# Altium PCB PDN Sample.PcbDoc
Units mm, origin at the board's own origin, x right, y up, seen from the top; angles counter-clockwise.
Board outline 47.25 x 33.5 mm, 4 copper layers (Top Layer, Mid Layer 1, Mid Layer 2, Bottom Layer), stack 1.57 mm thick; 4 components, 3 nets, 8 pads, 0 vias.
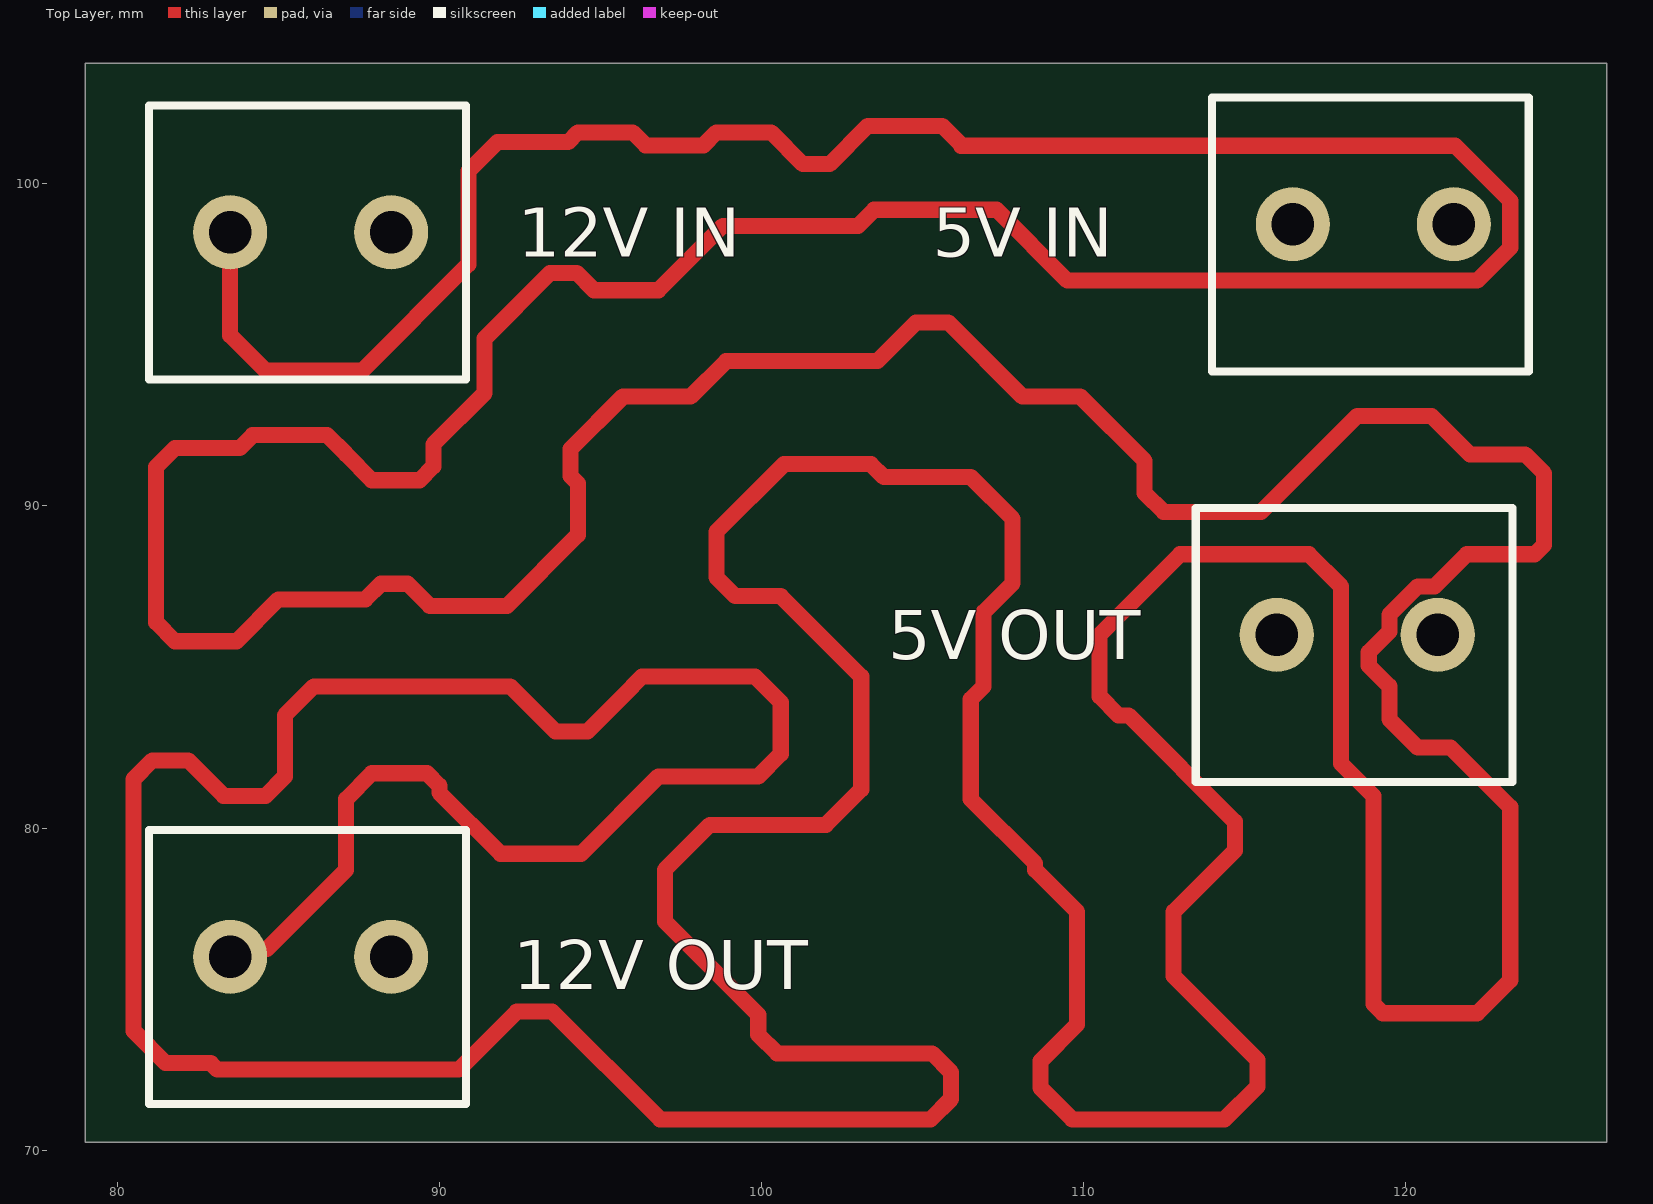
[diagram p0: Top Layer view]
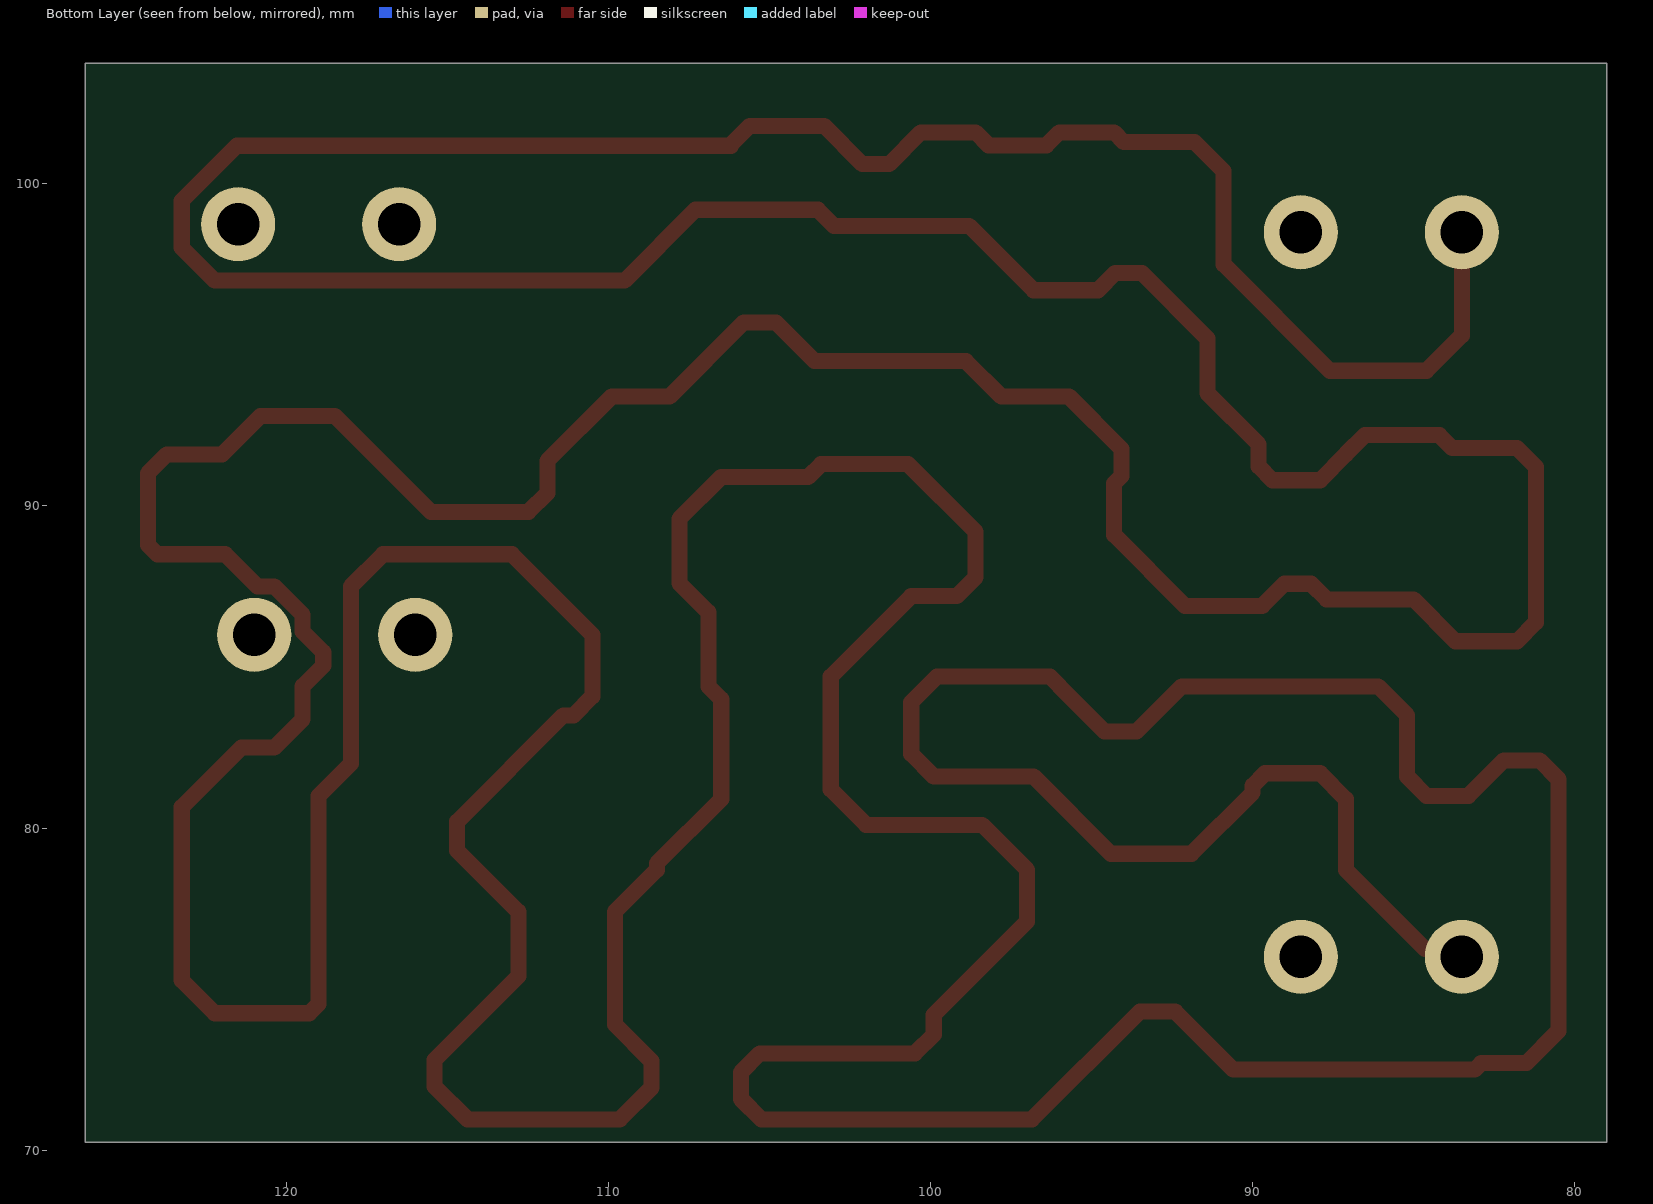
[diagram p1: Bottom Layer view, seen from below]
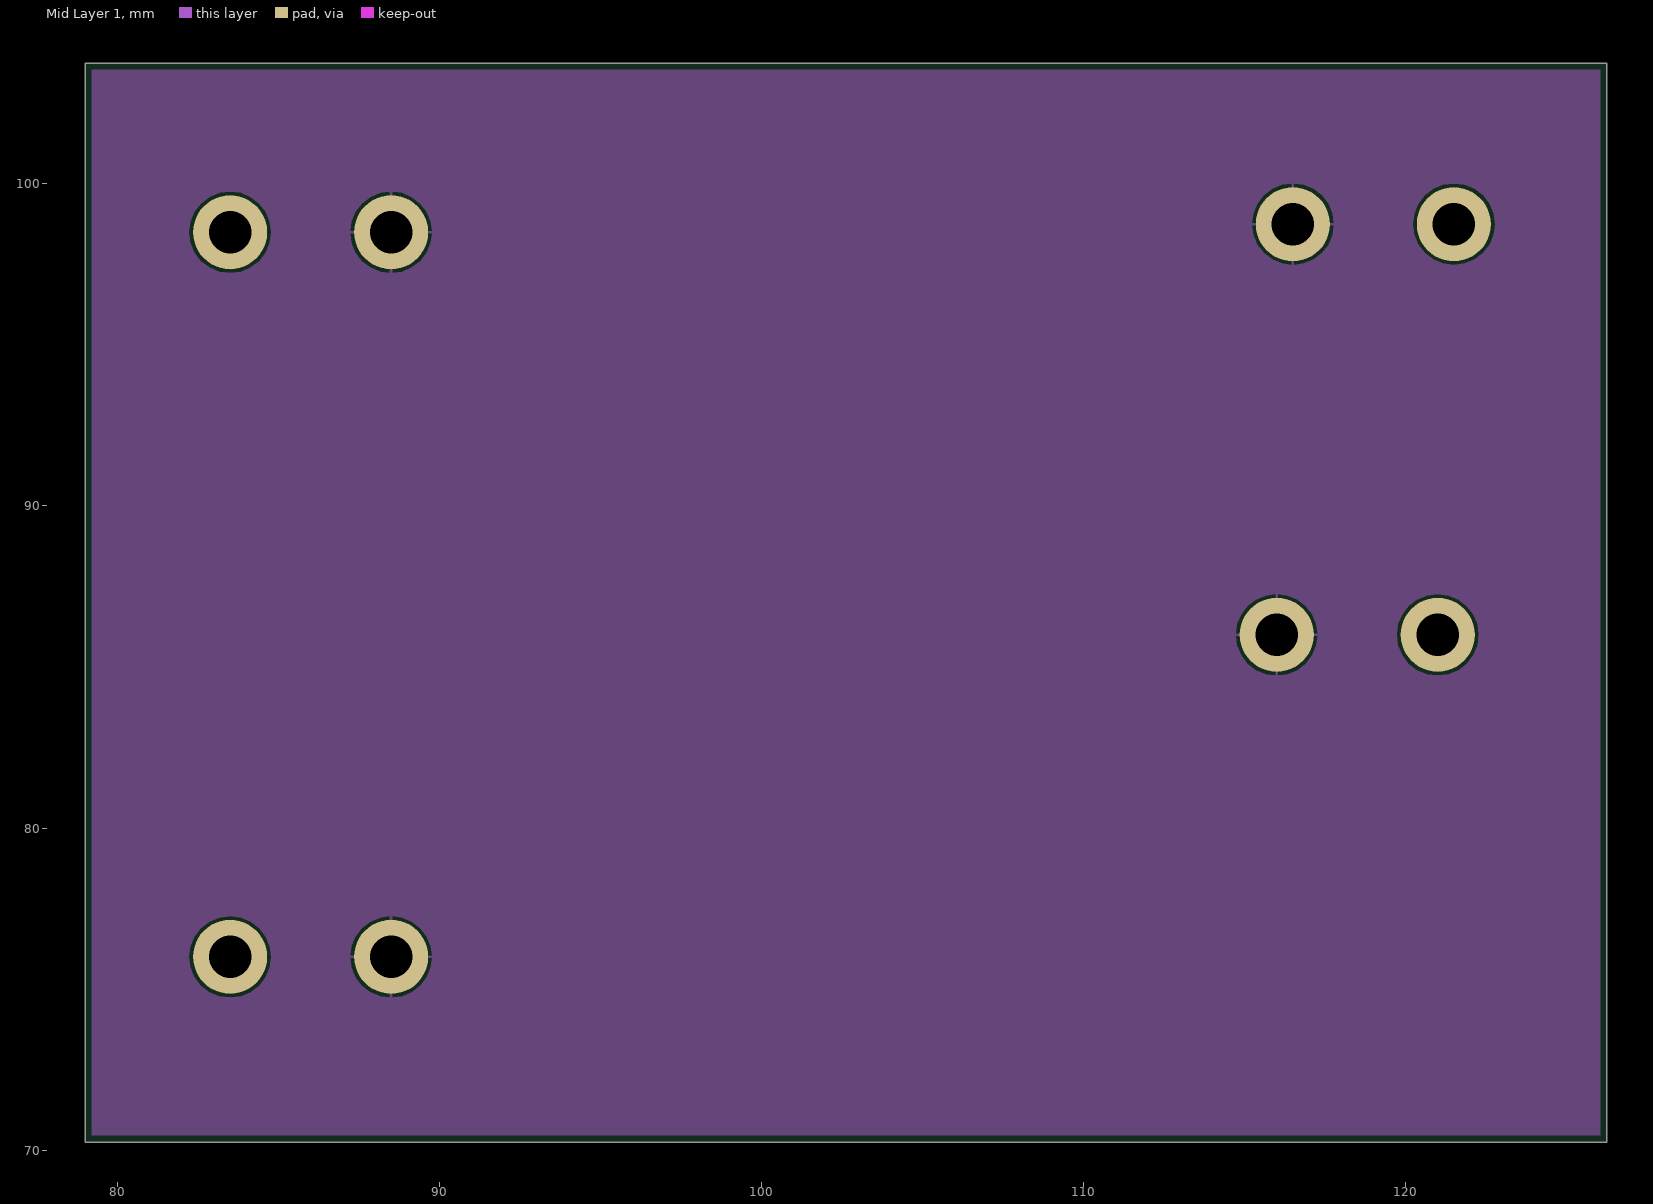
[diagram p2: Mid Layer 1]
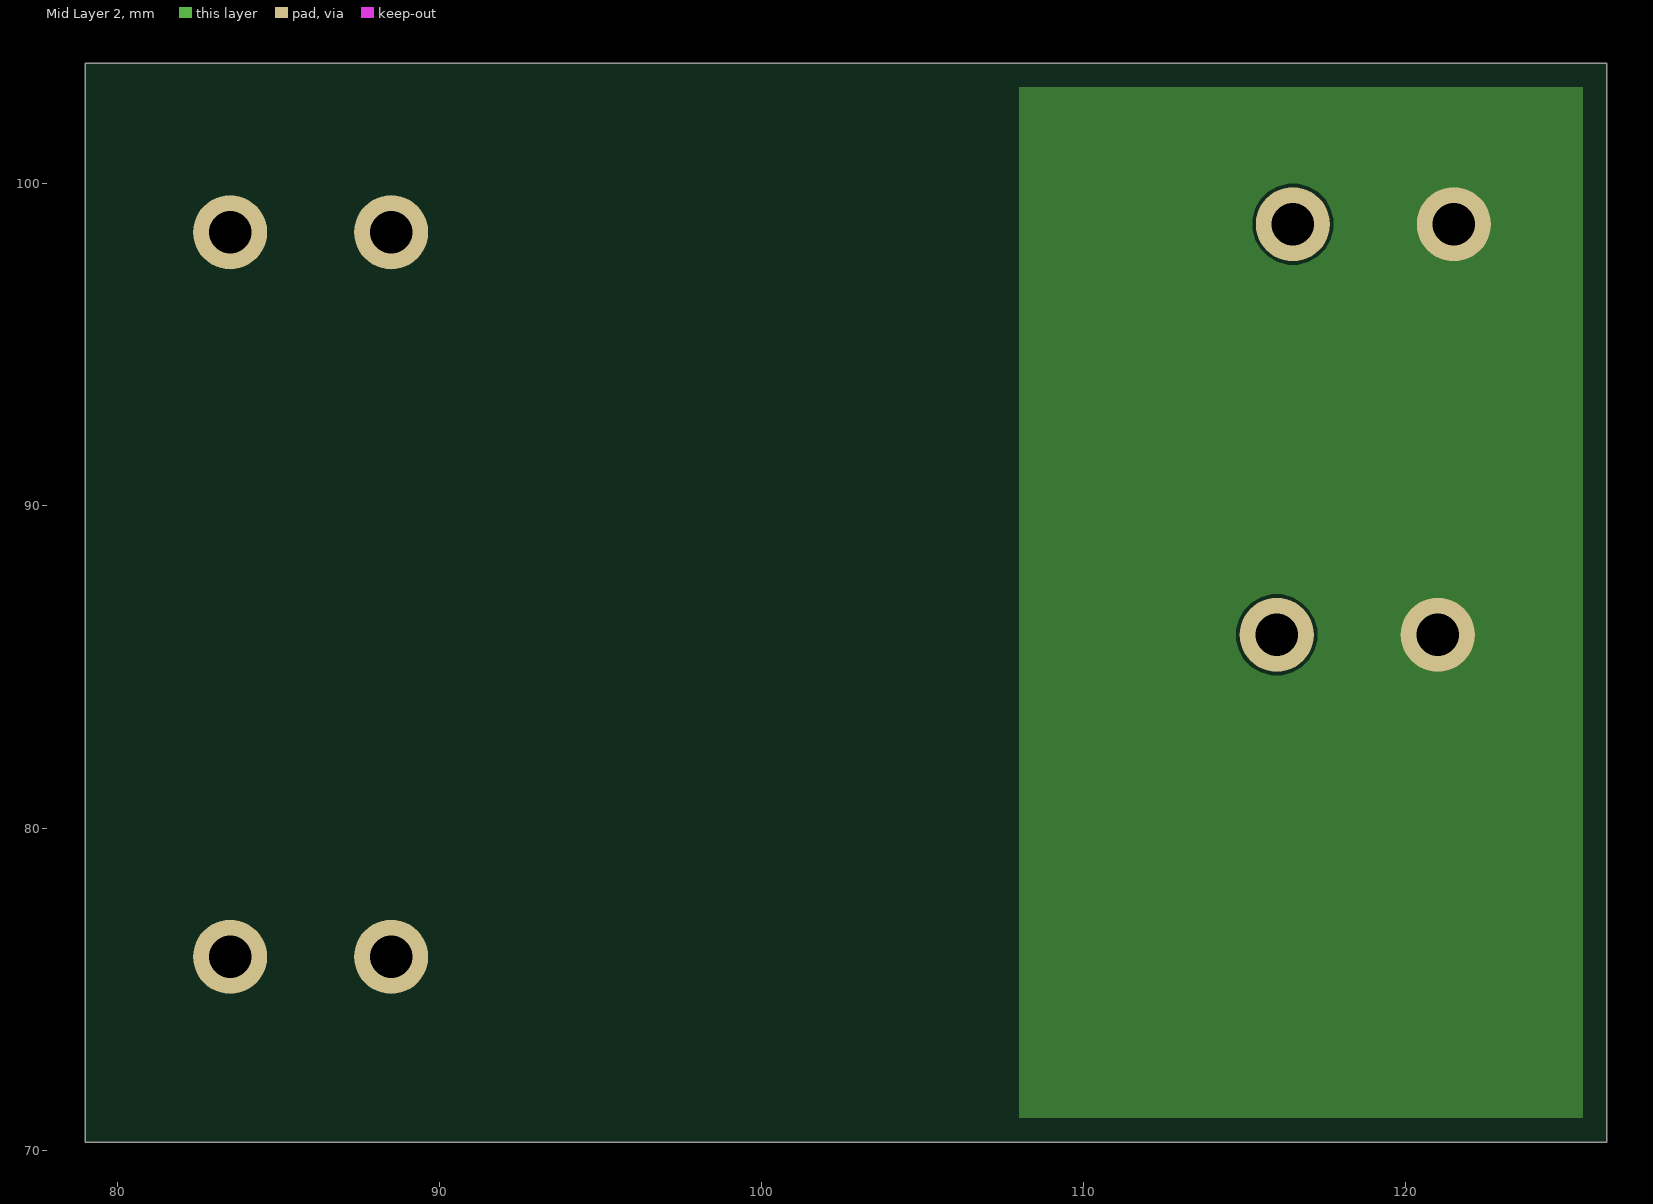
[diagram p3: Mid Layer 2]
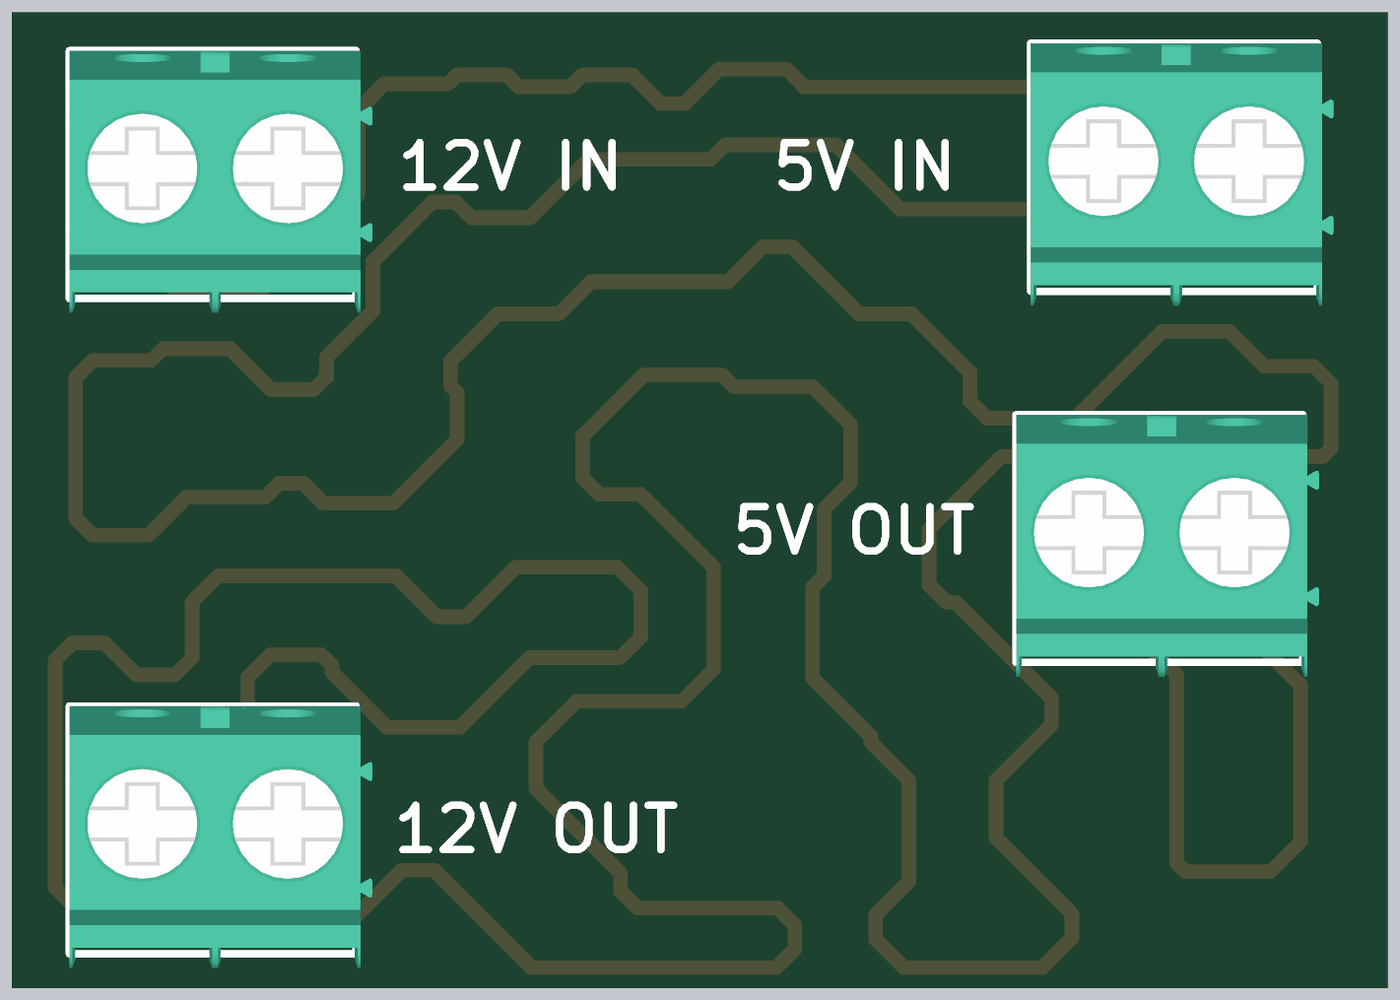
[diagram p4: 3D render of the assembled board from above, using the file's embedded part models]

## Layer stack, top to bottom
Top Solder: solder mask 0.0127, Solder Resist, Dk 3.8
Top Layer: signal copper 0.035
Dielectric 1: prepreg 0.2, 7628, Dk 4.6
Mid Layer 1: signal copper 0.0175
Core: core 1.065, FR-4, Dk 4.5
Mid Layer 2: signal copper 0.0175
Dielectric 2: prepreg 0.2, 7628, Dk 4.6
Bottom Layer: signal copper 0.035
Bottom Solder: solder mask 0.0127, Solder Resist, Dk 3.8

## Board outline
79,70.25 79,103.75 126.25,103.75 126.25,70.25

## Design rules (kind name [scope] priority, off if disabled: settings)
BoardOutlineClearance [All] p1: gap=0.2 ignorepadtopadclearanceinfootprint=FALSE
Clearance [All] p1: gap=0.102 ignorepadtopadclearanceinfootprint=FALSE except(0.127: Arc-Via Track-Via SMDPad-Via THPad-Via Via-Via Via-Fill Via-Poly Via-Region Via-Text; 0.25: Arc-Hole Track-Hole SMDPad-Hole THPad-Hole Via-Hole Fill-Hole Poly-Hole Region-Hole Text-Hole)
ComponentClearance [All] p1: gap=0.102 collisioncheckmode=3 verticalgap=0.102 showdistances=TRUE
DiffPairsRouting [All] p1: maxlimit=0.102 minlimit=0.102 mostfreqgap=0.102 toplayer_minwidth=0.102 toplayer_maxwidth=1816.048 toplayer_prefwidth=0.102 midlayer1_minwidth=0.102 midlayer1_maxwidth=1816.048 midlayer1_prefwidth=0.102 midlayer2_minwidth=0.102 midlayer2_maxwidth=1816.048 midlayer2_prefwidth=0.102 bottomlayer_minwidth=0.102 bottomlayer_maxwidth=1816.048 bottomlayer_prefwidth=0.102 maxuncoupledlength=12.7
Height [All] p1: minheight=0 maxheight=1816.048 prefheight=12.7
HoleSize [All] p1: absolutevalues=TRUE maxlimit=6.3 minlimit=0.2 maxpercent=80.000 minpercent=20.000
HoleToHoleClearance [All] p1: gap=0.25 allowstackedmicrovias=FALSE
MinimumAnnularRing [All] p1: minimumring=0.076
MinimumSolderMaskSliver [All] p1: minsoldermaskwidth=0
PlaneClearance [All] p1: clearance=0.102
PlaneConnect PlaneConnectPowerPads [InPadClass('PowerPads')] p1: planeconnectstyle=Direct reliefexpansion=0.508 reliefentries=4 reliefconductorwidth=0.254 reliefairgap=0.254
PlaneConnect [All] p2: pad.planeconnectstyle=Relief pad.reliefexpansion=0.3 pad.reliefentries=4 pad.reliefconductorwidth=0.102 pad.reliefairgap=0.102 via.planeconnectstyle=Direct via.reliefexpansion=0.3 via.reliefentries=4 via.reliefconductorwidth=0.127 via.reliefairgap=0.127
PolygonConnect PolygonConnectPowerPads [All vs (InPadClass('PowerPads'))] p1: connectstyle=Direct reliefconductorwidth=0.254 reliefentries=4 polygonreliefangle="90 Angle" airgapwidth=0.254
PolygonConnect [All] p2: thpad.connectstyle=Relief thpad.reliefconductorwidth=0.102 thpad.reliefentries=4 thpad.polygonreliefangle="90 Angle" thpad.airgapwidth=0.102 smdpad.connectstyle=Relief smdpad.reliefconductorwidth=0.102 smdpad.reliefentries=4 smdpad.polygonreliefangle="90 Angle" smdpad.airgapwidth=0.102 via.connectstyle=Direct via.reliefconductorwidth=0.127 via.reliefentries=4 via.polygonreliefangle="90 Angle" via.airgapwidth=0.127
RoutingVias [All] p1: holewidth=0.2 width=0.45 viastyle="Through Hole" minholewidth=0.2 minwidth=0.45 maxholewidth=6.3 maxwidth=6.55
SilkToSilkClearance [All] p1: silktosilkclearance=0
SilkToSolderMaskClearance [IsPad] p1: minsilkscreentomaskgap=0.102 clearancetoexposedcopper=TRUE
SolderMaskExpansion [All] p1: expansion=0.075 istentingtop=FALSE
Width [All] p1: maxlimit=1816.048 minlimit=0.102 preferedwidth=0.102
20 further rules are at their usual default settings.

## Components (designator, comment, footprint, x,y, rotation, side; value= is the part's Value field where it differs from the comment)
"5V IN" "Comment" 1935161 119,98.75 r0 top
"5V OUT" "Comment" 1935161 118.5,86 r0 top
"12V IN" "Comment" 1935161 86,98.5 r0 top
"12V OUT" "Comment" 1935161 86,76 r0 top

## Footprints (in the part's own frame and the unit in brackets; to place one, negate y for a bottom-side part, rotate by r counter-clockwise, add the part's x,y. Pads: shape width x height; smd on the part's side, far side on the other; paste and mask are expansions set on the pad)
1935161 [mm] "TERM BLK 2POS SIDE ENTRY 5MM PCB"
  round 2.3 hole 1.325: 1(-2.5,0) 2(2.5,0)
  silkscreen extent -5.01,-4.57 4.83,3.94, body extent -5.01,-5.06 5.39,3.94, height 11.41

## Nets (pads, with @x,y where several pads share a name; then routed paths per layer and width w, separated by ;. In a path a pad name is that pad's centre, name@x,y a point inside that pad or via, vN(x,y) a via of type N, cw(c..) or ccw(c..) an arc to the next point about the centre after c; other vN are vias at no path point)
5V: "5V IN.2" "5V OUT.2"
12V: "12V IN.1" "12V OUT.1" | length 383.8
  Top Layer w0.5: 83.5,76 83.749,76.249 84.649,76.249 87.1,78.7 87.1,80.9 87.9,81.7 89.614,81.7 90,81.314 90,81.1 91.9,79.2 94.4,79.2 96.8,81.6 99.9,81.6 100.6,82.3 100.6,83.9 99.8,84.7 96.286,84.7 96,84.414 96,84.4 94.6,83 93.6,83 92.2,84.4 86.1,84.4 85.2,83.5 85.2,81.6 84.6,81 83.3,81 82.2,82.1 81.086,82.1 80.5,81.514 80.5,73.7 81.5,72.7 82.9,72.7 83.1,72.5 90.6,72.5 92.4,74.3 93.5,74.3 96.85,70.95 105.25,70.95 105.886,71.586 105.886,72.414 105.3,73 100.486,73 99.9,73.586 99.9,74.2 97,77.1 97,78.7 98.4,80.1 102,80.1 103.1,81.2 103.1,84.7 100.6,87.2 99.186,87.2 98.6,87.786 98.6,89.2 100.7,91.3 103.4,91.3 103.8,90.9 106.5,90.9 107.8,89.6 107.8,87.6 106.9,86.7 106.9,84.4 106.5,84 106.5,80.9 108.5,78.9 108.5,78.7 109.8,77.4 109.8,73.9 108.664,72.764 108.664,71.936 109.65,70.95 114.378,70.95 115.4,71.972 115.4,72.8 112.8,75.4 112.8,77.4 114.7,79.3 114.7,80.2 111.4,83.5 111.086,83.5 110.5,84.086 110.5,86 113,88.5 117,88.5 118,87.5 118,82 119,81 119,74.541 119.293,74.248 122.226,74.248 123.252,75.274 123.252,80.648 121.402,82.498 120.378,82.498 119.498,83.378 119.498,84.402 118.857,85.043 118.857,85.457 119.498,86.098 119.498,86.622 120.378,87.502 120.902,87.502 121.9,88.5 124.007,88.5 124.3,88.793 124.3,91.014 123.714,91.6 122,91.6 120.8,92.8 118.5,92.8 115.514,89.814 112.486,89.814 111.9,90.4 111.9,91.4 109.9,93.4 108.1,93.4 105.8,95.7 104.8,95.7 103.6,94.5 98.9,94.5 97.8,93.4 95.7,93.4 94.064,91.764 94.064,90.936 94.3,90.7 94.3,89.1 92.1,86.9 89.7,86.9 89.014,87.586 88.186,87.586 87.7,87.1 85,87.1 83.7,85.8 81.786,85.8 81.2,86.386 81.2,91.214 81.786,91.8 83.8,91.8 84.2,92.2 86.514,92.2 87.1,91.614 87.1,91.6 87.9,90.8 89.387,90.8 89.814,91.227 89.814,91.914 91.4,93.5 91.4,95.2 93.436,97.236 94.264,97.236 94.8,96.7 96.8,96.7 98.8,98.7 103,98.7 103.5,99.2 107.3,99.2 109.502,96.998 122.226,96.998 123.252,98.024 123.252,99.476 121.541,101.186 106.2,101.186 106.2,101.214 105.614,101.8 103.3,101.8 102.114,100.614 101.286,100.614 100.3,101.6 98.6,101.6 98.2,101.2 96.4,101.2 96,101.6 94.3,101.6 94,101.3 91.8,101.3 90.9,100.4 90.9,97.5 87.6,94.2 84.6,94.2 83.5,95.3 83.5,98.5
GND: "5V IN.1" "5V OUT.1" "12V IN.2" "12V OUT.2"

## Polygon pours and split planes (outlines as drawn)
GND on Mid Layer 1 "GND_L02_P000" (solid, pour order 0): 79,70.25 79,103.75 126.25,103.75 126.25,70.25
5V on Mid Layer 2 "5V_L03_P001" (solid, pour order 1): 125.5,71 125.5,103 108,103 108,71

## Silkscreen, mask and mechanical layers (free items; w line width, h text height)
Mechanical 1:
  the board outline again, w0.254